# Altium PCB PCB1.PcbDoc
Units mm, origin at the board's own origin, x right, y up, seen from the top; angles counter-clockwise.
Board outline 20.95 x 27.94 mm, 2 copper layers (Top Layer, Bottom Layer); 3 components, 6 nets, 54 pads, 12 vias.
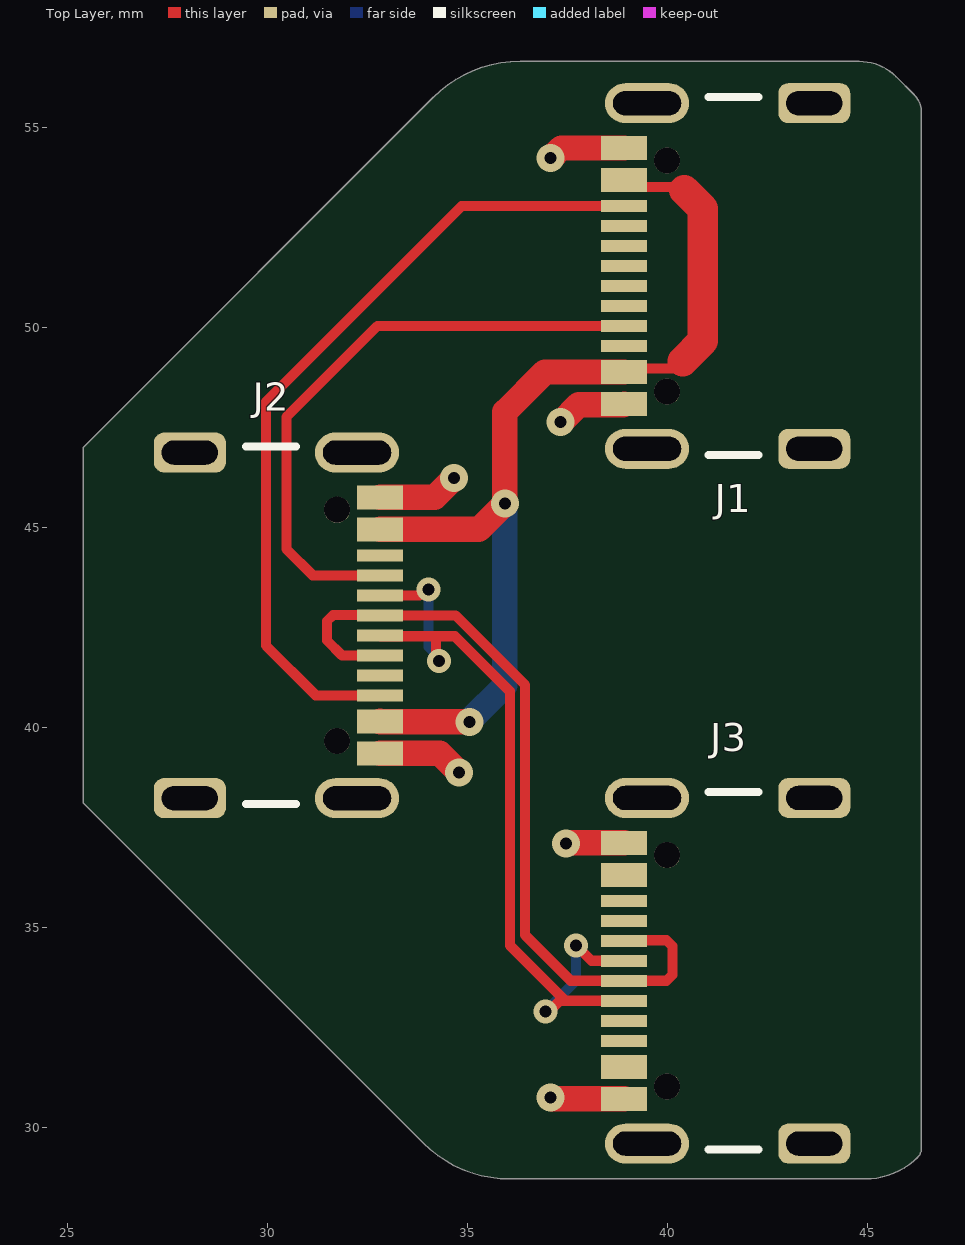
[diagram p0: Top Layer view]
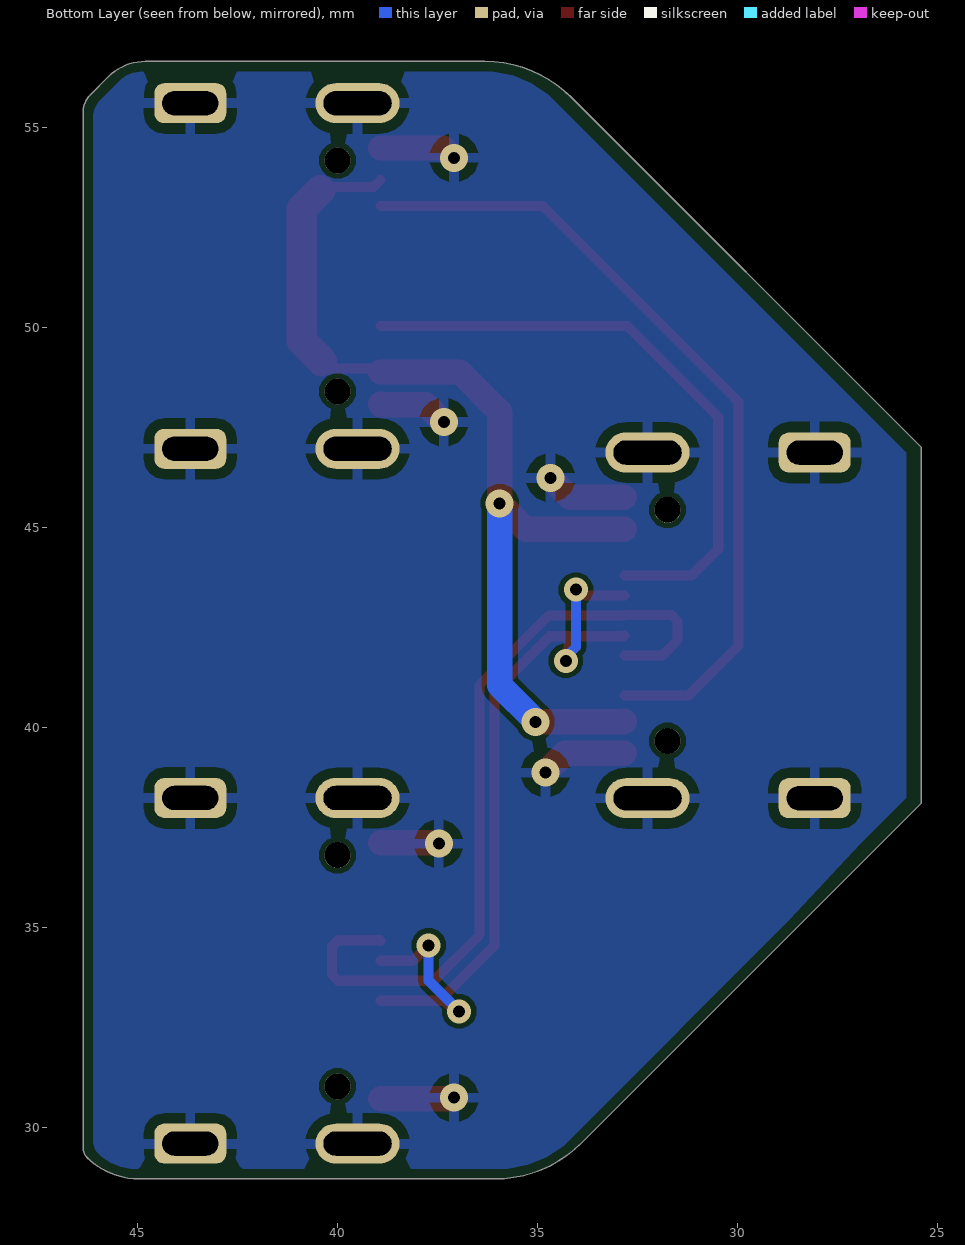
[diagram p1: Bottom Layer view, seen from below]
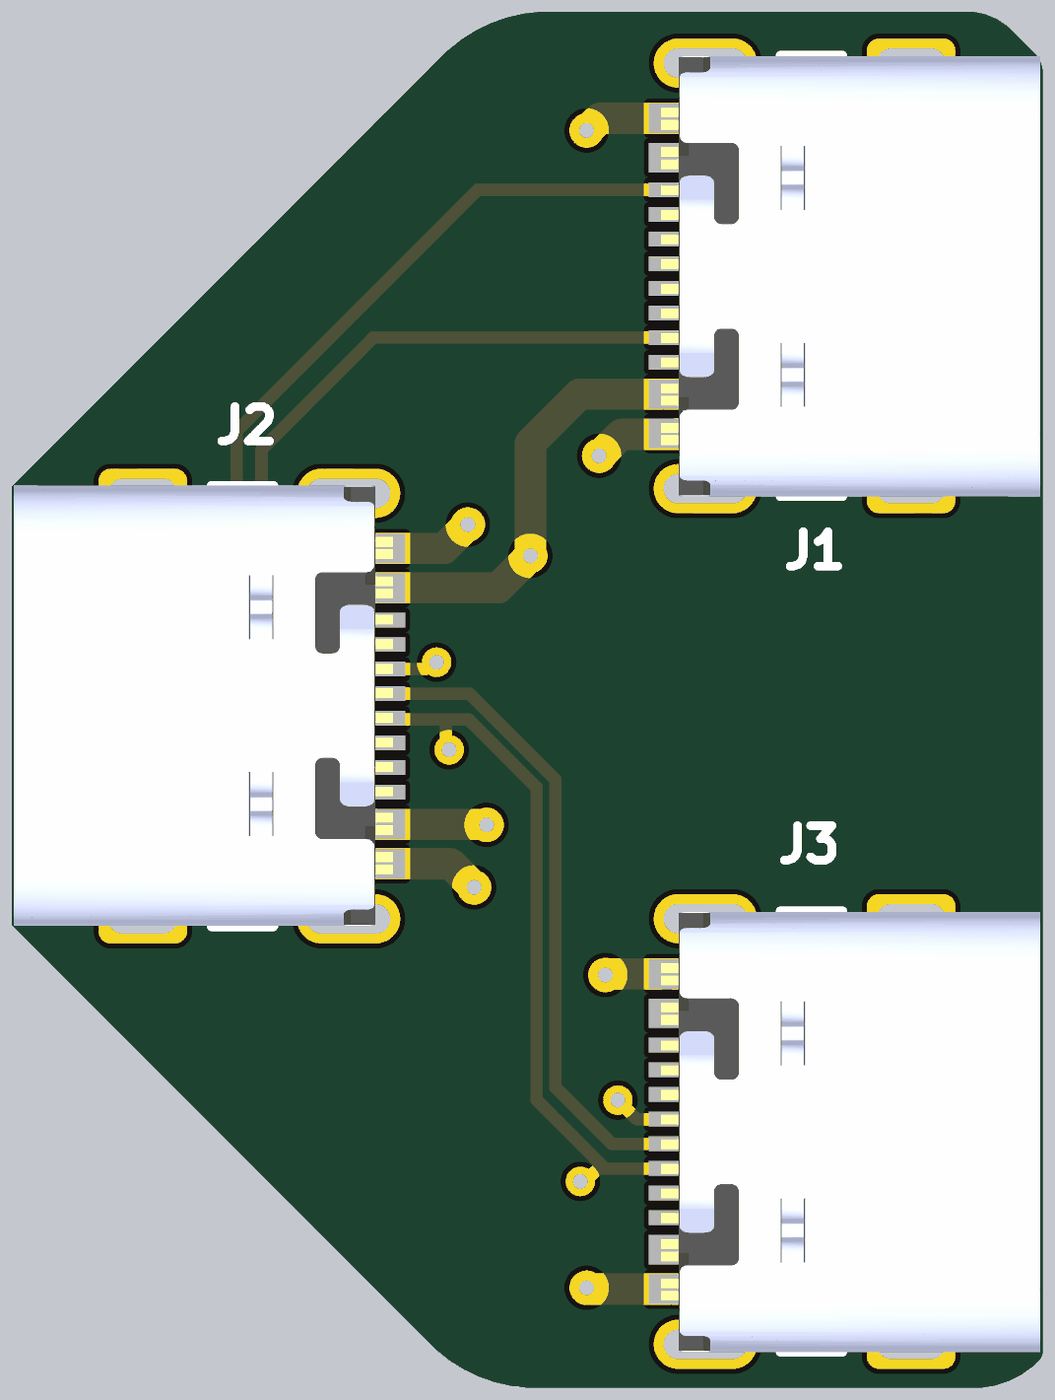
[diagram p2: 3D render of the assembled board from above, using the file's embedded part models]

## Layer stack, top to bottom
Top Solder: solder mask 0.0102, Solder Resist, Dk 3.5
Top Layer: signal copper 0.0356
Dielectric 1: dielectric 0.32, FR-4, Dk 4.8
Bottom Layer: signal copper 0.0356
Bottom Solder: solder mask 0.0102, Solder Resist, Dk 3.5

## Board outline
33.9,29.6 25.4,38.1 25.4,46.99 34.154,55.744 cw(c36.322,53.576) 36.322,56.642 44.8,56.642 cw(c44.8,55.341) 45.72,56.261 46.175,55.806 cw(c45.742,55.372) 46.355,55.372 46.355,29.464 cw(c46.048,29.464) 46.265,29.247 cw(c44.949,30.563) 44.949,28.702 36.068,28.702 cw(c36.068,31.768)

## Design rules (kind name [scope] priority, off if disabled: settings)
Clearance [All] p1: gap=0.127 ignorepadtopadclearanceinfootprint=FALSE
PolygonConnect [All] p1: connectstyle=Relief reliefconductorwidth=0.254 reliefentries=4 polygonreliefangle="90 Angle" airgapwidth=0.254
RoutingVias [All] p1: holewidth=0.3 width=0.6 viastyle="Through Hole" minholewidth=0.3 minwidth=0.4 maxholewidth=0.3 maxwidth=0.7
SolderMaskExpansion [All] p1: expansion=0.102 istentingtop=FALSE
SupplyNets "Schematic Supply Nets_1" [InNet('GND')] p1: voltage=0.000
SupplyNets "Schematic Supply Nets" [InNet('VCC')] p2: voltage=0.000
Width [All] p1: maxlimit=0.762 minlimit=0.254 preferedwidth=0.254 minimp=50.000000 maximp=50.000000 favimp=50.000000
30 further rules are at their usual default settings.

## Components (designator, comment, footprint, x,y, rotation, side; value= is the part's Value field where it differs from the comment)
J1 "CONN RCP USB2.0 TYP C 24P SMD RA" GCT_USB4105-GF-A 43.677,51.277 r90 top
J2 "CONN RCP USB2.0 TYP C 24P SMD RA" GCT_USB4105-GF-A 28.067,42.543 r270 top
J3 "CONN RCP USB2.0 TYP C 24P SMD RA" GCT_USB4105-GF-A 43.677,33.907 r90 top

## Footprints (in the part's own frame and the unit in brackets; to place one, negate y for a bottom-side part, rotate by r counter-clockwise, add the part's x,y. Pads: shape width x height; smd on the part's side, far side on the other; paste and mask are expansions set on the pad)
GCT_USB4105-GF-A [mm]
  rect 0.6x1.15 smd: A1_B12(-3.2,4.755) A4_B9(-2.4,4.755) B1_A12(3.2,4.755) B4_A9(2.4,4.755)
  rect 0.3x1.15 smd: A5(-1.25,4.755) A6(-0.25,4.755) A7(0.25,4.755) A8(1.25,4.755) B5(1.75,4.755) B6(0.75,4.755) B7(-0.75,4.755) B8(-1.75,4.755)
  oval 1x2.1 hole 0.6 slot 1.7 at 90 deg: SH1(-4.32,4.18) SH2(4.32,4.18)
  rrect50% 1x1.8 hole 0.6 slot 1.4 at 90 deg: SH3(-4.32,0) SH4(4.32,0)
  round 0.65 hole 0.65 unplated: ""(-2.89,3.68) ""(2.89,3.68)
  silkscreen extent -4.47,1.4 4.47,2.65, body extent -4.48,-2.63 4.46,5.08, height 3.31

## Part data
J1 J2 J3: "CONN RCP USB2.0 TYP C 24P SMD RA PN: USB4105-GF-A", Package=None, Availability=Unavailable, MF="{'manufacturer': u'GCT'}", PN=USB4105-GF-A, Price=None

## Via types
v1: diameter 0.7, hole 0.3, Top Layer to Bottom Layer, 8 vias
v2: diameter 0.6, hole 0.3, Top Layer to Bottom Layer, 4 vias

## Nets (pads, with @x,y where several pads share a name; then routed paths per layer and width w, separated by ;. In a path a pad name is that pad's centre, name@x,y a point inside that pad or via, vN(x,y) a via of type N, cw(c..) or ccw(c..) an arc to the next point about the centre after c; other vN are vias at no path point)
CC1: J1.A5 J2.A5 | length 15.3
  Top Layer w0.254: J2.A5 31.137,43.793 30.48,44.45 30.48,47.752 32.755,50.027 J1.A5
CC2: J1.B5 J2.B5 | length 20.4
  Top Layer w0.254: J2.B5 31.216,40.793 29.972,42.037 29.972,48.133 34.866,53.027 J1.B5
GND: J1.A1_B12 J1.B1_A12 J1.SH1 J1.SH2 J1.SH3 J1.SH4 J2.A1_B12 J2.B1_A12 J2.SH1 J2.SH2 J2.SH3 J2.SH4 J3.A1_B12 J3.B1_A12 J3.SH1 J3.SH2 J3.SH3 J3.SH4 | length 11.3
  Top Layer w0.635: J2.B1_A12 34.317,39.343 v1(34.798,38.862) ; J2.A1_B12 34.186,45.743 v1(34.671,46.228) ; v1(37.084,30.734) 37.102,30.734 37.129,30.707 J3.A1_B12 ; v1(37.084,54.229) 37.102,54.229 37.35,54.477 J1.B1_A12 ; v1(37.338,47.625) 37.356,47.625 37.79,48.059 38.904,48.059 J1.A1_B12 ; v1(37.465,37.084) 37.483,37.084 37.506,37.107 J3.B1_A12
NetJ2_A6: J2.A6 J2.B6 J3.A6 J3.B6 | length 20.2
  Top Layer w0.254: J2.B6 31.867,41.793 31.496,42.164 31.496,42.65 31.645,42.799 32.816,42.799 J2.A6 34.708,42.793 36.449,41.052 36.449,34.798 37.59,33.657 J3.A6 39.983,33.657 40.132,33.806 40.132,34.522 39.983,34.671 38.936,34.671 J3.B6
NetJ2_A7: J2.A7 J2.B7 J3.A7 J3.B7 | length 21.4
  Top Layer w0.254: J2.A7 32.845,42.27 34.163,42.27 ; J2.B7 33.801,43.293 33.942,43.434 v2(34.036,43.434) ; v2(34.29,41.656) 34.224,41.722 34.224,42.209 34.163,42.27 ; v2(36.957,32.893) 37.051,32.893 37.315,33.157 37.455,33.157 ; v2(37.719,34.544) 38.106,34.157 J3.A7 ; J3.B7 37.455,33.157 ; 34.163,42.27 34.692,42.27 36.068,40.894 36.068,34.544 37.455,33.157
  Bottom Layer w0.254: v2(34.036,43.434) 34.036,42.004 34.29,41.75 v2(34.29,41.656) ; v2(36.957,32.893) 37.719,33.655 v2(37.719,34.544)
VCC: J1.A4_B9 J1.B4_A9 J2.A4_B9 J2.B4_A9 | length 25
  Top Layer w0.254: J1.A4_B9 39.011,48.966 40.203,48.966 40.386,49.149 ; J1.B4_A9 39.095,53.504 40.349,53.504 40.431,53.422
  Top Layer w0.635: J2.B4_A9 32.827,40.138 35.046,40.138 v1(35.052,40.132) ; J2.A4_B9 35.291,44.943 v1(35.941,45.593) 35.941,47.879 36.939,48.877 J1.A4_B9
  Top Layer w0.762: 40.386,49.149 40.894,49.657 40.894,52.959 40.431,53.422
  Bottom Layer w0.635: v1(35.052,40.132) 35.052,40.15 35.941,41.039 v1(35.941,45.593)
pads on no net: J1. J1.A6 J1.A7 J1.A8 J1.B6 J1.B7 J1.B8 J2. J2.A8 J2.B8 J3. J3.A4_B9 J3.A5 J3.A8 J3.B4_A9 J3.B5 J3.B8

## Polygon pours and split planes (outlines as drawn)
GND on Bottom Layer "GND_L02_P000" (solid, pour order 0): 26.924,37.084 25.781,38.227 25.781,46.863 34.562,55.644 cw(c36.358,53.848) 36.358,56.388 44.853,56.388 cw(c44.853,55.521) 45.466,56.134 45.921,55.679 cw(c45.488,55.245) 46.101,55.245 46.101,29.644 cw(c45.667,29.644) 45.974,29.337 cw(c45.054,30.257) 45.054,28.956 35.977,28.956 cw(c35.977,31.496) 34.181,29.7 28.702,35.179

## Silkscreen, mask and mechanical layers (free items; w line width, h text height)
Mechanical 1:
  the board outline again, w0.127